# Altium PCB P-MT3620EXMSTLP-2-0.PcbDoc (part 3 of 3)
Units mm, origin at the board's own origin, x right, y up, seen from the top; angles counter-clockwise.
Board outline 50.01 x 80.01 mm, 4 copper layers (Top Layer, Mid-Layer 1, Mid-Layer 2, Bottom Layer), stack 1.536 mm thick; 94 components, 87 nets, 380 pads, 193 vias.
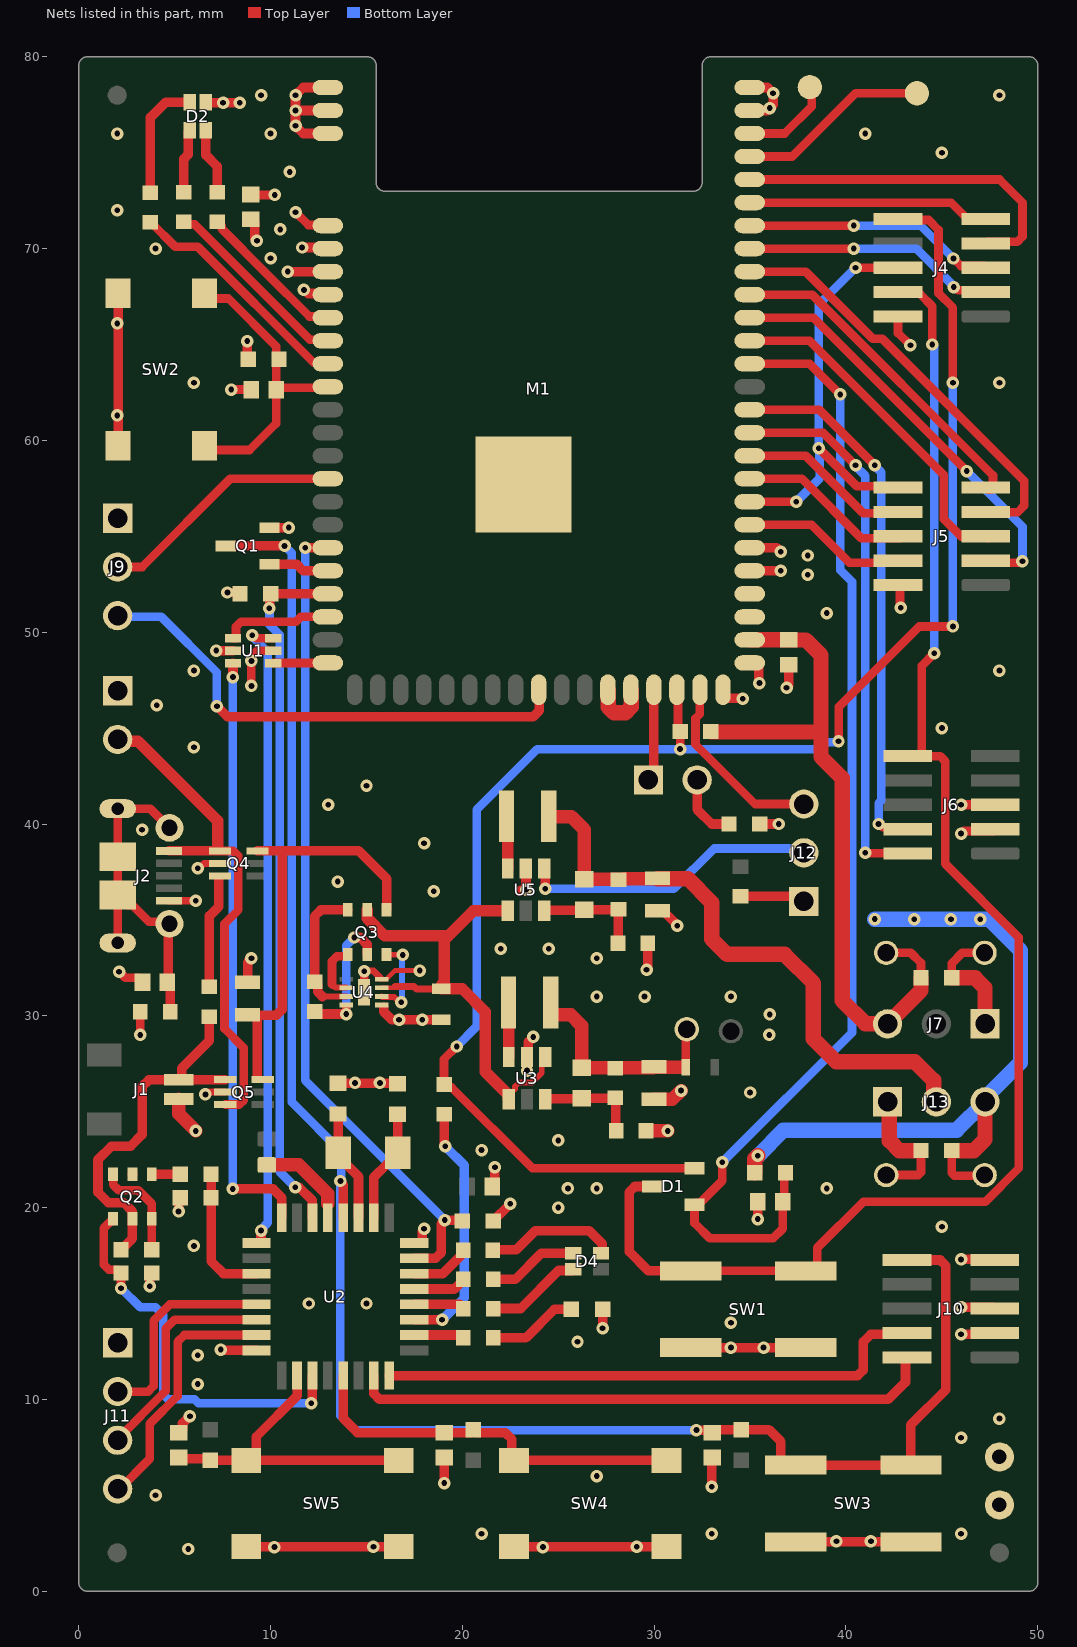
[diagram p4: the nets of this part, all layers, seen from the top]

## Via types
v1: diameter 0.65, hole 0.3, Top Layer to Bottom Layer, tented both sides, 193 vias

## Nets (pads, with @x,y where several pads share a name; then routed paths per layer and width w, separated by ;. In a path a pad name is that pad's centre, name@x,y a point inside that pad or via, vN(x,y) a via of type N, cw(c..) or ccw(c..) an arc to the next point about the centre after c; other vN are vias at no path point) (continued)
3V3_MT3620: C3.2 D2.4 J13.3 M1.2 M1.3 M1.42 M1.43 R2.2 R4.2 R27.2 TP6.1 U1.5 | length 51.2
  Top Layer w0.45: v1(9,47.2) 9,48.746 9.293,49.039 10.136,49.039 U1.5@10.138,49.037 ; R27.2@45.51,22.975 45.51,21.808 45.656,21.661 TP6.1@47.191,21.661
  Top Layer w0.5: D2.4@6.625,77.625 6.65,77.6 v1(8.396,77.6) ; v1(8.788,65.176) 8.788,64.285 R4.2@8.837,64.236 ; C3.2@8.964,71.524 9.015,71.524 9.171,71.368 9.171,70.529 v1(9.284,70.416) ; v1(10.9,68.8) M1.3@12.984,68.8 ; v1(11.638,70.057) 12.927,70.057 M1.2@12.984,70 ; M1.42@34.984,53.2 v1(36.6,53.2) ; M1.43@35.041,54.343 M1.43@34.984,54.4 36.4,54.4 v1(36.6,54.2)
  Top Layer w0.6: R27.2@45.646,22.975 R27.2@45.66,22.961
  Top Layer w0.8: R2.2@35.249,21.809 35.249,22.552 v1(35.399,22.702) ; R27.2@45.66,22.961 46.66,22.961 47.25,23.551 J13.3@47.25,25.515
  Bottom Layer w0.8: v1(35.399,22.702) 36.736,24.04 45.774,24.04 J13.3@47.25,25.515 47.25,25.711 49.098,27.56 49.098,33.402 47.464,35.036 v1(47.001,35.036) 45.476,35.036 v1(45.472,35.04) v1@43.64,35.04 ; v1(41.499,35.043) v1@43.558,35.043
  other v1: 43.565,35.036 9,48.5 7.523,77.6
3V3_MT3620_RTC: C4.2 J7.3 M1.39 R3.2 R5.2 TP2.1 | length 37.1
  Top Layer w0.45: TP2.1@42.092,33.283 43.377,33.283 43.91,32.75 R3.2@43.91,31.975
  Top Layer w0.8: R5.2@32.95,44.826 32.976,44.8 38.7,44.8 ; M1.39@34.984,49.6 35.384,49.6 35.387,49.603 C4.2@37.015,49.603 37.022,49.597 37.903,49.597 38.7,48.8 38.7,44.8 ; R3.2@43.91,31.975 43.91,31.319 J7.3@42.17,29.579 42.157,29.592 41.008,29.592 39.8,30.8 39.8,42.4 38.7,43.5 38.7,44.8
BATTERY_LEVEL: R20.1 R22.2 U2.11 | length 7
  Top Layer w0.5: R20.1@6.896,21.59 6.896,20.32 6.896,17.204 7.545,16.555 U2.11@9.266,16.555
DEBUG_CTS: J5.8 M1.47 | length 9.1
  Top Layer w0.45: M1.47@34.984,59.2 37.9,59.2 40.9,56.2 42.784,56.2 J5.8@42.814,56.17
DEBUG_RTS: J4.6 J5.10 M1.45 | length 23
  Top Layer w0.45: M1.45@34.984,56.8 v1(37.4,56.8) ; v1(38.583,59.588) 40.561,57.61 J5.10@42.651,57.61 ; v1(40.5,69) J4.6@42.714,69
  Bottom Layer w0.45: v1(37.4,56.8) 38.625,58.025 38.625,58.592 38.621,58.596 38.621,59.55 v1(38.583,59.588) 38.583,67.083 v1(40.5,69)
DEBUG_RXD: J5.4 M1.44 | length 8.6
  Top Layer w0.45: M1.44@34.984,55.6 38.2,55.6 40.17,53.63 J5.4@42.814,53.63
DEBUG_TXD: J5.6 M1.46 | length 9.1
  Top Layer w0.45: M1.46@34.984,58 37.7,58 40.8,54.9 J5.6@42.814,54.9
EXT_PMU_EN: J12.3 M1.36 | length 9.9
  Top Layer w0.45: M1.36@32.384,47 32.384,45.737 32.15,45.503 32.15,44.15 35.26,41.04 J12.3@37.8,41.04
FLASH_STM32: M1.15 R14.2 U2.31 | length 43.5
  Top Layer w0.5: v1(11.8,54.4) M1.15@12.984,54.4 ; U2.31@17.496,17.355 17.5,17.359 18.607,17.359 18.9,17.652 18.9,19.167 v1(19.082,19.349) ; v1@19.072,19.35 19.85,19.35 R14.2@19.95,19.25
  Bottom Layer w0.45: v1(11.8,54.4) 11.8,26.631 v1(19.082,19.349)
GND: C1.2 C2.1 C3.1 C4.1 C5.1 C6.1 C7.1 C8.1 C9.1 C10.1 C11.1 C12.1 C14.1 C16.1 C17.1 D3.1 J1.2 J2.5 J3.1 J4.2 J5.2 J6.3 J6.5 J9.1 J10.3 J10.5 J10.9 J11.1 M1.1 M1.4 M1.37 M1.38 M1.40 M1.41 M1.62 M1.63 M1.64 M1.65 M1.66 M1.67 pad.4 Q1.2 Q2.5 Q4.2 Q5.2 R1.1 R6.1 R7.1 R14.1 R22.1 R23.1 R25.1 R31.1 SW1.2 SW1.4 SW2.3 SW2.4 SW3.1 SW3.3 SW4.1 SW4.2 SW5.1 SW5.2 U1.2 U2.16 U2.32 U3.2 U4.1 U4.4 U4.9 U5.2 | length 113.5
  Top Layer w0.25: U4.4@15.794,31.908 16.019,31.908 16.471,32.36 17.755,32.36 v1@17.779,32.384
  Top Layer w0.35: v1(6.198,37.694) 6.279,37.694 6.527,37.942 7.359,37.942 Q4.2@7.361,37.945 ; v1(6.6,25.9) 6.722,26.022 Q5.2@7.629,26.022 ; v1(14.889,32.328) 14.904,32.343 15.362,32.343 U4.4@15.731,31.974
  Top Layer w0.4: J2.5@4.703,35.999 6.099,35.999 v1(6.1,36)
  Top Layer w0.45: v1(2.1,32.3) 2.418,31.982 3.141,31.982 3.323,31.801 C1.2@3.323,31.75 ; v1(3.2,29) 3.213,29.013 R1.1@3.213,30.209 ; v1(7.75,52.07) 8.33,52.07 R6.1@8.4,52 ; v1(7.949,62.651) C5.1@8.989,62.651 ; C3.1@8.964,72.819 8.987,72.796 v1(10.211,72.796) ; v1(11.3,71.9) 11.972,71.228 12.956,71.228 M1.1@12.984,71.2 ; U4.9@14.889,31.253 v1(14.889,32.328) ; J4.2@42.714,66.46 42.714,65.599 v1(43.357,64.957) ; J5.2@42.814,52.368 42.814,51.306 v1(42.85,51.27) ; v1(46,39.5) 46.137,39.638 47.693,39.638 J6.3@47.786,39.73
  Top Layer w0.5: SW2.4@2.05,59.725 SW2.3@2.05,67.675 ; Q2.5@2.794,21.737 Q2.5@2.798,21.741 ; v1(3.7,15.9) 3.7,16.492 R23.1@3.8,16.592 ; C11.1@5.201,8.266 5.251,8.266 5.408,8.422 5.408,8.751 5.776,9.119 v1(5.791,9.119) ; v1(5.2,19.8) 5.2,20.41 R22.1@5.296,20.506 ; v1(7.167,49.039) 8.036,49.039 U1.2@8.038,49.037 ; v1(7.4,12.6) 7.445,12.555 U2.16@9.266,12.555 ; SW5.2@8.725,2.322 SW5.1@16.675,2.322 ; C16.1@8.8,31.75 8.8,32.8 v1(9,33) ; Q1.2@9.943,55.453 v1(10.941,55.453) v1@10.945,55.456 ; v1(11.735,67.843) 11.775,67.843 11.961,67.657 12.927,67.657 M1.4@12.984,67.6 ; M1.64@12.984,76 11.7,76 v1(11.3,76.4) v1(11.3,77.2) ; M1.65@12.984,77.2 v1(11.3,77.2) ; M1.66@12.984,78.4 11.7,78.4 v1(11.3,78) v1(11.3,77.2) ; C9.1@13.512,26.484 13.524,26.472 16.607,26.472 C8.1@16.619,26.461 ; U4.1@15.894,30.433 15.894,30.218 16.312,29.8 C14.1@18.9,29.8 ; U2.32@17.496,18.155 17.897,18.155 17.901,18.159 17.901,18.801 v1(18,18.9) ; v1@19.05,5.639 C10.1@19.05,6.972 ; C6.1@21.548,21.1 21.697,21.249 v1(21.697,22.102) ; R14.1@21.6,19.3 v1(22.5,20.2) ; SW4.2@22.695,2.322 SW4.1@30.645,2.322 ; 23,36.5 23.047,36.547 23.289,36.547 v1(23.317,36.576) 23.316,36.578 23.316,37.674 U5.2@23.314,37.676 ; v1(23.368,27.143) U3.2@23.368,27.854 23.443,27.929 23.443,28.643 v1(23.7,28.9) ; v1(27.309,13.709) 27.309,14.684 D3.1@27.325,14.7 ; v1(29.6,32.4) 29.664,32.464 R31.1@29.664,33.782 ; C17.1@30.172,35.472 30.472,35.472 31.2,34.744 v1(31.2,34.7) ; SW1.2@31.9,12.7 SW1.4@37.9,12.7 ; v1(33.003,5.446) 33.003,6.955 C7.1@33.02,6.972 ; M1.37@33.584,47 33.584,46.7 33.723,46.561 34.592,46.561 v1(34.62,46.533) ; M1.38@34.984,48.4 35.303,48.4 35.441,48.261 35.441,47.429 35.484,47.386 v1(35.484,47.346) ; M1.62@34.984,77.2 35.9,77.2 36.2,77.5 v1(36.2,78.1) 35.9,78.4 M1.63@34.984,78.4 ; v1(35.4,19.4) 35.4,20.308 C2.1@35.401,20.309 ; R7.1@35.5,40 v1(36.5,40) ; v1(36.9,47.1) 37.015,47.215 C4.1@37.015,48.308 ; SW3.3@37.386,2.572 SW3.1@43.386,2.572 ; v1(46,13.4) 47.69,13.4 J10.3@47.752,13.462 ; v1@46,14.8 47.684,14.8 J10.5@47.752,14.732 ; v1(46,17.3) 47.724,17.3 J10.9@47.752,17.272 ; v1(46,41) J6.5@47.786,41
  Top Layer w0.7: J1.2@5.207,25.662 5.207,24.893 v1(6.1,24) ; R25.1@29.575,24 v1(30.7,24) ; C12.1@29.979,25.643 30.943,25.643 v1(31.4,26.1)
  other v1: 5.7,2.2 10.2,2.3 24.2,2.3 15.362,2.322 29.088,2.322 39.5,2.6 41.3,2.6 21,3 33,3 46,3 4,5 19.051,5.638 27,6 46,8 48,9 6.2,10.8 6.2,12.3 34,12.7 35.7,12.7 26,13 34,14 46,14.8 12,15 15,15 6,18 45,19 25,20 25.5,21 27,21 39,21 21,23 25,23.5 35,26 14.4,26.5 15.7,26.5 36,29 16.7,29.8 17.9,29.8 36.02,30.073 27,31 29.5,31 34,31 17.78,32.36 27,33 22,33.5 24.5,33.5 18.5,36.5 13.5,37 18,39 3.3,39.7 13,41 15,42 6,44 45,45 4.057,46.187 6,48 48,48 39,51 38,53 38,54 2,61.3 6,63 48,63 2,66.1 10,69.5 4,70 10.5,71 2,72 11,74 45,75 2,76 10,76 41,76 36.027,77.327 9.5,78 48,78
MEASURE_BATTERY: Q2.1 R23.2 U2.19 | length 20.8
  Top Layer w0.45: Q2.1@1.78,19.407 1.78,19.311 1.755,19.286 1.659,19.286 1.3,18.927 1.3,17.031 1.564,16.767 2.025,16.767 R23.2@2.2,16.592 2.2,16.442 v1(2.2,15.8)
  Top Layer w0.5: v1(12.116,9.804) 12.116,9.845 12.181,9.91 U2.19@12.181,11.24
  Bottom Layer w0.45: v1(2.2,15.8) 3.2,14.8 4,14.8 4.4,14.4 4.4,10.264 4.664,10 6.041,10 6.237,9.804 v1(12.116,9.804)
MT3620_BUTTON_A: C5.2 M1.8 R4.1 SW2.1 SW2.2 | length 16
  Top Layer w0.45: SW2.2@6.568,59.525 6.593,59.5 8.9,59.5 10.285,60.885 C5.2@10.285,62.651 ; SW2.1@6.568,67.475 6.643,67.4 7.8,67.4 10.3,64.9 10.3,64.373 R4.1@10.437,64.236 10.285,64.084 C5.2@10.285,62.651 ; M1.8@12.984,62.8 12.927,62.743 10.376,62.743 C5.2@10.285,62.651
MT3620_LED_B: M1.7 R9.2 | length 12.3
  Top Layer w0.45: R9.2@3.735,71.367 3.76,71.367 5.027,70.1 6.2,70.1 12.243,64.057 12.927,64.057 M1.7@12.984,64
MT3620_LED_G: M1.5 R8.1 | length 7.9
  Top Layer w0.45: R8.1@7.22,71.397 7.245,71.397 7.451,71.191 7.451,71.03 9.7,68.781 12.023,66.457 12.927,66.457 M1.5@12.984,66.4
MT3620_LED_R: M1.6 R10.1 | length 10.1
  Top Layer w0.45: R10.1@5.476,71.397 5.607,71.266 6.034,71.266 6.438,70.862 ; 6.438,70.861 12.041,65.257 12.927,65.257 M1.6@12.984,65.2
MT3620_RESET: D1.3 J4.4 J6.10 SW1.1 SW1.3 | length 77.9
  Top Layer w0.45: SW1.1@31.9,16.7 SW1.3@37.9,16.7 38.225,16.7 38.5,16.975 38.5,17.9 40.909,20.309 47.267,20.309 49,22.042 49,34.1 45.174,37.926 45.174,43.276 44.91,43.54 43.945,43.54 43.945,48.243 v1(44.598,48.897) ; J4.4@42.714,67.73 42.806,67.637 43.863,67.637 44.5,67 v1(44.5,65)
  Top Layer w0.5: D1.3@29.9,21.1 28.993,21.1 28.7,20.807 28.7,17.7 29.7,16.7 SW1.1@31.9,16.7
  Bottom Layer w0.45: v1(44.5,65) 44.598,64.902 v1(44.598,48.897)
MT3620_RX: M1.20 U1.4 | length 2.8
  Top Layer w0.45: U1.4@10.144,48.394 M1.20@12.978,48.394
MT3620_SPARE1: J9.2 M1.12 | length 12.7
  Top Layer w0.45: J9.2@2.2,53.4 3.3,53.4 7.9,58 M1.12@12.984,58
MT3620_SPARE2: J9.3 M1.29 | length 26.4
  Top Layer w0.5: v1(7.2,46.14) 7.74,45.6 23.7,45.6 24,45.9 24,46.984 M1.29@23.984,47
  Bottom Layer w0.45: J9.3@2.025,50.86 2.086,50.8 4.3,50.8 7.2,47.9 v1(7.2,46.14)
MT3620_SWCLK: J6.4 M1.49 | length 28.2
  Top Layer w0.45: M1.49@34.984,61.6 38.6,61.6 v1(41.5,58.7) ; v1(41.7,40) 41.754,40 41.932,39.822 43.121,39.822 J6.4@43.214,39.73
  Bottom Layer w0.45: v1(41.5,58.7) 41.5,58.67 41.834,58.336 41.834,41.225 41.7,41.091 v1(41.7,40)
MT3620_SWDIO: J6.2 M1.48 | length 28.4
  Top Layer w0.45: M1.48@34.984,60.4 38.8,60.4 v1(40.5,58.7) ; v1(41.01,38.5) 41.03,38.48 42.73,38.48 J6.2@42.75,38.5
  Bottom Layer w0.45: v1(40.5,58.7) 40.5,58.654 41,58.154 41,38.51 v1(41.01,38.5)
MT3620_SYSRST_N: C2.2 D1.1 M1.51 R2.1 | length 60.5
  Top Layer w0.45: v1(33.554,22.366) 33.554,21.399 32.405,20.25 32.2,20.25 D1.1@32.1,20.15 32.1,19.2 32.9,18.4 36.2,18.4 36.697,18.897 C2.2@36.697,20.309 36.773,20.385 36.773,21.733 R2.1@36.849,21.809 ; M1.51@34.984,64 38.1,64 v1(39.7,62.4)
  Bottom Layer w0.45: v1(33.554,22.366) 40.31,29.122 40.31,52.634 39.7,53.243 v1(39.7,62.4)
MT3620_TX: M1.18 U1.1 | length 5.8
  Top Layer w0.45: U1.1@8.038,49.687 8.198,49.687 8.198,50.282 8.462,50.546 11.328,50.546 11.582,50.8 M1.18@12.984,50.8
NetC1_1: C1.1 J2.6 J2.7 J2.8 J2.9 J2.10 R1.2 | length 18.1
  Top Layer w0.45: J2.9@2.028,33.798 J2.6@2.028,36.298 ; J2.7@4.728,34.799 4.673,34.743 4.507,34.91 3.655,34.91 2.791,35.774 2.553,35.774 J2.6@2.028,36.298 ; J2.8@4.728,39.799 3.728,40.799 J2.10@2.028,40.799 J2.6@2.028,38.299 J2.6@2.028,36.298
  Top Layer w0.5: J2.7@4.673,34.743 4.673,31.805 C1.1@4.618,31.75 4.762,31.606 R1.2@4.762,30.234
NetC8_2: C8.2 U2.2 X1.1 | length 6
  Top Layer w0.5: U2.2@15.381,19.47 15.385,19.474 15.385,21.585 16.054,22.254 16.221,22.254 16.631,22.665 X1.1@16.631,22.855 16.625,22.861 16.625,24.855 C8.2@16.619,24.861
NetC9_2: C9.2 U2.3 X1.2 | length 5.9
  Top Layer w0.5: C9.2@13.512,24.884 13.522,24.874 13.522,22.865 X1.2@13.532,22.855 13.532,22.665 14.581,21.616 U2.3@14.581,19.47
NetC12_2: C12.2 C13.2 L1.2 R21.1 R24.2 TP3.1 | length 11.9
  Top Layer w0.45: R21.1@31.651,27.319 TP3.1@31.651,29.251
  Top Layer w0.7: L1.2@24.6,30.7 24.6,30.11 24.65,30.06 25.64,30.06 26.229,29.471 C13.2@26.229,27.293 26.242,27.28 27.966,27.28 R24.2@27.979,27.268 28.004,27.293 29.954,27.293 29.979,27.319 R21.1@31.526,27.319
NetC13_1: C13.1 R24.1 R25.2 U3.6 | length 5.4
  Top Layer w0.5: U3.6@24.318,25.654 24.337,25.673 26.21,25.673 C13.1@26.229,25.693 26.242,25.706 27.966,25.706 R24.1@27.979,25.718 28.002,25.695 28.002,24.023 R25.2@28.025,24
NetC14_2: C14.2 Q3.5 U3.1 U3.4 U4.3 U5.4 | length 26
  Top Layer w0.25: U4.3@15.794,31.458 16.42,31.458 16.49,31.528
  Top Layer w0.3: U3.4@22.418,25.654 22.418,25.859 22.743,26.184 22.743,26.308 22.952,26.518 23.627,26.518 24.143,27.034 24.143,27.679 U3.1@24.318,27.854
  Top Layer w0.36: 16.49,31.528 17.484,31.528 17.611,31.4 C14.2@18.9,31.4
  Top Layer w0.6: Q3.5@15.038,35.522 15.038,35.079 15.954,34.163 19.05,34.163 19.263,34.163 ; U5.4@22.364,35.476 20.576,35.476 19.263,34.163 ; U3.4@22.418,25.654 22.393,25.679 22.393,25.884 21.197,27.08 21.197,30.204 20,31.4 C14.2@18.9,31.4 18.925,31.425 18.925,31.626 19.05,31.751 19.05,33.95 19.263,34.163
NetC15_1: C15.1 R29.1 R31.2 U5.6 | length 5.7
  Top Layer w0.5: U5.6@24.264,35.476 24.287,35.499 26.339,35.499 C15.1@26.362,35.522 26.375,35.535 R29.1@28.127,35.535 ; R31.2@28.115,33.782 28.127,33.795 R29.1@28.127,35.535 ; R29.1@28.14,35.547 R29.1@28.127,35.535
NetC15_2: C15.2 C17.2 J13.2 L2.2 R29.2 | length 31.3
  Top Layer w0.7: L2.2@24.5,40.386 25.686,40.386 26.362,39.71 C15.2@26.362,37.122 26.375,37.109 28.127,37.109 R29.2@28.14,37.097 28.171,37.128 28.378,37.128 28.398,37.148 C17.2@30.172,37.148
  Top Layer w0.8: C17.2@30.172,37.148 31.753,37.148 33,35.9 33,34 33.8,33.2 36.8,33.2 38.3,31.7 38.3,28.8 39.5,27.6 43.6,27.6 44.569,26.631 44.569,26.169 44.571,26.166 44.571,25.654 J13.2@44.71,25.515
NetC16_2: C16.2 Q3.4 Q4.6 Q5.6 | length 22.5
  Top Layer w0.5: C16.2@8.8,30.05 8.816,30.034 C16.2@9.3,30.034 ; Q5.6@9.3,26.744 C16.2@9.3,30.034 ; Q4.6@9.317,38.595 10.5,38.595 ; Q3.4@16.048,35.522 16.048,37.152 14.605,38.595 10.5,38.595 ; C16.2@9.3,30.034 10.307,30.034 10.6,30.327 10.6,38.495 10.5,38.595
NetD2_1: D2.1 R8.2 | length 3.5
  Top Layer w0.5: D2.1@6.625,76.175 6.625,74.875 7.22,74.28 R8.2@7.22,72.946
NetD2_2: D2.2 R10.2 | length 3.4
  Top Layer w0.5: R10.2@5.476,72.946 5.476,74.676 5.7,74.9 5.7,76.1 D2.2@5.775,76.175
NetD2_3: D2.3 R9.1 | length 6.3
  Top Layer w0.5: R9.1@3.735,72.916 3.735,76.835 4.525,77.625 D2.3@5.775,77.625
NetD3_2: D3.2 R11.1 | length 4.7
  Top Layer w0.5: R11.1@21.603,13.208 23.308,13.208 24.8,14.7 D3.2@25.675,14.7
NetD4_1: D4.1 R16.2 | length 5
  Top Layer w0.5: R16.2@21.603,14.732 21.612,14.741 23.041,14.741 25.02,16.72 25.72,16.72 D4.1@25.775,16.775
NetD4_2: D4.2 R17.2 | length 4.7
  Top Layer w0.5: R17.2@21.603,16.256 22.756,16.256 24.125,17.625 D4.2@25.775,17.625
NetD4_3: D4.3 R18.1 | length 6.9
  Top Layer w0.5: R18.1@21.59,17.78 21.61,17.8 22.8,17.8 23.8,18.8 26.6,18.8 27.3,18.1 27.3,17.7 D4.3@27.225,17.625
NetFB1_2: FB1.2 U2.5 | length 4.3
  Top Layer w0.7: FB1.2@9.8,22.225 11.475,22.225 12.981,20.719 U2.5@12.981,20.2
NetIO1_1: IO1.1 M1.61 | length 5.1
  Top Layer w0.45: M1.61@34.984,76 36.8,76 38.208,77.408 IO1.1@38.208,78.66
NetIO2_1: IO2.1 M1.60 | length 10.1
  Top Layer w0.45: M1.60@34.984,74.8 37.2,74.8 40.5,78.1 IO2.1@43.7,78.1
NetJ7_1: J7.1 R3.1 TP1.1 | length 6.5
  Top Layer w0.45: R3.1@45.51,31.975 45.51,32.727 46.065,33.283 TP1.1@47.224,33.283
  Top Layer w0.8: R3.1@45.51,31.975 46.73,31.975 47.25,31.455 J7.1@47.25,29.579
NetJ8_1: J8.1 M1.34 | length 4.8
  Top Layer w0.5: J8.1@29.7,42.3 29.984,42.584 M1.34@29.984,47
NetJ8_2: J8.2 R7.2 | length 3.5
  Top Layer w0.5: J8.2@32.24,42.3 32.24,40.76 33,40 R7.2@33.925,40
NetJ12_1: J12.1 R28.1 | length 3.4
  Top Layer w0.5: R28.1@34.5,36.225 37.535,36.225 J12.1@37.8,35.96
NetJ12_2: J12.2 U5.1 | length 15.5
  Top Layer w0.5: U5.1@24.264,37.676 24.323,37.617 v1(24.323,36.618)
  Bottom Layer w0.45: v1(24.323,36.618) 31.018,36.618 33.125,38.725 36.999,38.725 37.019,38.705 37.595,38.705 J12.2@37.8,38.5
NetJ13_1: J13.1 R27.1 TP5.1 | length 6.9
  Top Layer w0.45: TP5.1@42.095,21.696 43.763,21.696 43.91,21.842 R27.1@43.91,22.975
  Top Layer w0.6: J13.1@42.17,25.515 J13.1@42.256,25.429 ; R27.1@43.81,22.961 R27.1@43.824,22.975
  Top Layer w0.8: J13.1@42.256,25.429 42.256,23.487 42.782,22.961 R27.1@43.81,22.961
NetL1_1: L1.1 U3.3 | length 2.9
  Top Layer w0.6: L1.1@22.4,30.7 22.416,30.684 22.416,28.086 22.418,28.084 U3.3@22.418,27.854
NetL2_1: L2.1 U5.3 | length 2.8
  Top Layer w0.6: L2.1@22.214,40.386 22.364,40.236 U5.3@22.364,37.676
NetM1_32: M1.32 M1.33 | length 3.3
  Top Layer w0.8: M1.32@27.584,47 27.6,46.984 27.6,46.1 27.9,45.8 28.5,45.8 28.8,46.1 28.8,46.984 M1.33@28.784,47
NetQ2_3: Q2.3 Q2.6 R19.1 | length 5.4
  Top Layer w0.45: Q2.6@1.784,21.737 1.788,21.733 1.788,21.193 2.081,20.9 3.103,20.9 3.8,20.203 3.8,19.536 3.804,19.532 Q2.3@3.804,19.411 3.802,19.409 3.802,17.802 R19.1@3.8,17.8
NetQ2_4: Q2.4 R20.2 | length 1.5
  Top Layer w0.5: Q2.4@3.804,21.737 3.804,21.735 3.808,21.731 R20.2@5.296,21.731
NetQ3_1: Q3.1 U4.6 | length 3
  Top Layer w0.3: 13.222,31.63 13.378,31.473 U4.6@13.944,31.473
  Top Layer w0.45: 13.222,31.63 13.2,31.651 13.2,32.839 13.464,33.102 13.999,33.102 14.028,33.131 Q3.1@14.028,33.196
NetQ3_2: Q3.2 R26.1 U4.8 | length 7.5
  Top Layer w0.45: v1(13.944,30.092) 13.944,30.425
  Top Layer w0.5: R26.1@12.3,30.225 12.431,30.094 12.96,30.094 12.963,30.092 v1(13.944,30.092) ; v1(14.367,34.083) 14.679,34.083 15.034,33.728 15.034,33.2 Q3.2@15.038,33.196
  Bottom Layer w0.45: v1(13.944,30.092) 13.944,33.66 v1(14.367,34.083)
NetQ3_3: Q3.3 U4.2 | length 4.5
  Top Layer w0.3: U4.2@15.794,31.008 15.819,30.983 16.446,30.983 16.72,30.709 v1(16.815,30.709) ; Q3.3@16.048,33.196 16.06,33.184 16.879,33.184 v1(16.891,33.172)
  Bottom Layer w0.3: v1(16.815,30.709) 16.853,30.747 16.853,33.134 v1(16.891,33.172)
NetQ3_6: Q3.6 R26.2 U4.7 | length 7.5
  Top Layer w0.3: 12.698,31.008 U4.7@13.944,31.008
  Top Layer w0.5: 12.698,31.008 12.456,31.25 12.456,31.644 12.325,31.775 R26.2@12.3,31.775 12.3,35.2 12.622,35.522 Q3.6@14.028,35.522
NetQ4_3: Q4.3 R30.2 | length 5.9
  Top Layer w0.5: R30.2@6.804,31.509 6.804,35.204 7.3,35.7 Q4.3@7.3,37.192
NetR32_1: R32.1 U2.27 | length 13.1
  Top Layer w0.5: U2.27@17.496,14.155 v1(18.94,14.155) ; R32.1@19.044,24.869 19.044,23.256 v1(19.1,23.2)
  Bottom Layer w0.5: v1(18.94,14.155) 18.955,14.155 20.1,15.3 20.1,22.2 v1(19.1,23.2)
RECOVERY_CTS: J4.7 M1.59 | length 18.5
  Top Layer w0.45: M1.59@34.984,73.6 48,73.6 49.2,72.4 49.2,70.626 48.936,70.362 47.378,70.362 J4.7@47.286,70.27
RECOVERY_RTS: J4.9 M1.58 | length 12.7
  Top Layer w0.45: M1.58@34.984,72.4 45.473,72.4 46.333,71.54 J4.9@47.286,71.54
RECOVERY_RXD: J4.3 M1.56 | length 13.3
  Top Layer w0.45: M1.56@34.984,70 v1(40.4,70) ; v1(45.618,67.996) 45.673,67.996 45.846,67.822 47.193,67.822 J4.3@47.286,67.73
  Bottom Layer w0.45: v1(40.4,70) 43.657,70 45.618,68.038 v1(45.618,67.996)
RECOVERY_TXD: J4.5 M1.57 | length 13.2
  Top Layer w0.45: M1.57@34.984,71.2 v1(40.4,71.2) ; v1(45.6,69.484) 45.992,69.092 47.193,69.092 J4.5@47.286,69
  Bottom Layer w0.45: v1(40.4,71.2) 43.884,71.2 v1(45.6,69.484)
RESET_STM32: M1.16 Q1.1 | length 3.2
  Top Layer w0.5: Q1.1@9.943,53.548 11.352,53.548 11.7,53.2 M1.16@12.984,53.2
SERVICE_CTS: J5.7 M1.55 | length 22.2
  Top Layer w0.45: M1.55@34.984,68.8 37.9,68.8 41.4,65.3 41.887,65.3 49.3,57.887 49.3,56.6 48.962,56.262 47.478,56.262 J5.7@47.386,56.17
SERVICE_RTS: J5.9 M1.54 | length 17.5
  Top Layer w0.45: M1.54@34.984,67.6 38.235,67.6 47.667,58.169 47.667,57.532 47.574,57.44 J5.9@47.386,57.44
SERVICE_RXD: J5.3 M1.53 | length 22.4
  Top Layer w0.45: M1.53@34.984,66.4 38.3,66.4 v1(46.3,58.4) ; J5.3@47.386,53.63 49.13,53.63 v1(49.2,53.7)
  Bottom Layer w0.45: v1(46.3,58.4) 49.2,55.5 v1(49.2,53.7)
SERVICE_TXD: J5.5 M1.52 | length 18
  Top Layer w0.45: M1.52@34.984,65.2 38.1,65.2 45.1,58.2 45.1,55.9 46.008,54.992 47.293,54.992 J5.5@47.386,54.9
ST_SWCLK: J10.4 U2.24 | length 28.8
  Top Layer w0.5: U2.24@16.181,11.24 40.607,11.24 40.9,11.533 40.9,13 41.294,13.394 43.112,13.394 J10.4@43.18,13.462
ST_SWDIO: J10.2 U2.23 | length 30.5
  Top Layer w0.5: U2.23@15.381,11.24 15.385,11.236 15.385,10.293 15.678,10 42.2,10 43.1,10.9 43.1,12.124 43.168,12.192 J10.2@43.18,12.192
STM32_BUTTON_A: C11.2 R15.1 SW5.3 SW5.4 U2.18 | length 17.1
  Top Layer w0.5: C11.2@5.201,6.971 5.276,6.895 6.783,6.895 R15.1@6.858,6.82 6.859,6.821 8.851,6.821 SW5.4@8.852,6.822 ; SW5.4@8.725,6.822 SW5.4@8.852,6.822 ; 9.25,7.512 9.25,7.22 SW5.4@8.852,6.822 ; 9.25,7.513 9.25,8.05 11.381,10.181 U2.18@11.381,11.24 ; SW5.3@16.675,6.822 SW5.4@8.852,6.822
STM32_BUTTON_B: C10.2 R13.1 SW4.3 SW4.4 U2.21 | length 20.6
  Top Layer w0.5: U2.21@13.781,11.24 13.781,9.019 14.532,8.268 C10.2@19.05,8.268 20.422,8.268 R13.1@20.574,8.42 20.724,8.27 22.23,8.27 22.573,7.927 22.573,6.944 SW4.4@22.695,6.822 ; SW4.4@22.8,6.822 SW4.3@30.645,6.822
STM32_LED_B: R18.2 U2.30 | length 3.1
  Top Layer w0.5: U2.30@17.496,16.555 18.982,16.555 19.91,17.482 19.91,17.649 R18.2@20.041,17.78
STM32_LED_ERROR: R11.2 U2.26 | length 2.6
  Top Layer w0.5: U2.26@17.496,13.355 19.922,13.355 20.022,13.255 R11.2@20.022,13.177
STM32_LED_G: R17.1 U2.29 | length 2.8
  Top Layer w0.5: U2.29@17.496,15.755 19.578,15.755 20.053,16.231 R17.1@20.053,16.256
STM32_LED_R: R16.1 U2.28 | length 2.7
  Top Layer w0.5: U2.28@17.496,14.955 19.856,14.955 20.053,14.757 R16.1@20.053,14.732
STM32_RESET: C7.2 J10.10 Q1.3 R12.1 SW3.2 SW3.4 U2.4 | length 96.5
  Top Layer w0.5: Q1.3@7.657,54.5 v1(10.73,54.5) ; v1(13.64,21.387) 13.64,21.346 13.785,21.201 13.785,19.474 U2.4@13.781,19.47 ; v1(32.2,8.4) 32.888,8.4 C7.2@33.02,8.268 33.172,8.42 35.98,8.42 36.6,7.8 36.6,6.822 36.85,6.572 SW3.4@37.386,6.572 SW3.2@43.386,6.572 43.386,8.686 45.2,10.5 45.2,16.974 44.907,17.266 43.186,17.266 J10.10@43.18,17.272
  Bottom Layer w0.45: v1(10.73,54.5) 11.1,54.13 11.1,25.5 13.792,22.808 13.792,22.358 13.678,22.244 13.678,21.425 v1(13.64,21.387) 13.64,9.16 13.78,9.02 14.4,8.4 v1(32.2,8.4)
STM32_RX: U1.6 U2.9 | length 33.5
  Top Layer w0.45: v1(9.042,49.835) 9.097,49.835 9.248,49.684 U1.6@10.135,49.684
  Top Layer w0.5: U2.9@9.266,18.155 9.496,18.155 9.5,18.159 v1(9.5,18.8)
  Bottom Layer w0.45: v1(9.042,49.835) 9.042,49.781 9.855,48.968 9.855,19.209 9.5,18.854 v1(9.5,18.8)
STM32_SPARE_1: J11.2 U2.13 | length 11.1
  Top Layer w0.45: J11.2@2.025,10.409 2.035,10.4 3.607,10.4 3.9,10.693 3.9,14.1 4.755,14.955 U2.13@9.266,14.955
STM32_SPARE_2: J11.3 U2.14 | length 11.8
  Top Layer w0.45: J11.3@2.025,7.869 2.025,7.934 4.525,10.434 4.525,13.687 4.993,14.155 U2.14@9.266,14.155
STM32_SPARE_3: J11.4 U2.15 | length 13.3
  Top Layer w0.45: J11.4@2.025,5.329 2.129,5.329 3.7,6.9 3.7,8.725 5.15,10.175 5.15,13 5.505,13.355 U2.15@9.266,13.355
STM32_TX: U1.3 U2.8 | length 31.2
  Top Layer w0.5: v1(8.025,20.975) 10.125,20.975 10.577,20.523 10.577,19.474 U2.8@10.581,19.47 ; v1(8.038,47.662) U1.3@8.038,48.387
  Bottom Layer w0.45: v1(8.025,20.975) 8.025,47.649 v1(8.038,47.662)
V_BAT: J1.1 Q2.2 Q5.1 R19.2 R30.1 | length 20
  Top Layer w0.5: R19.2@2.2,17.8 2.79,18.39 2.79,19.407 Q2.2@2.794,19.411 2.79,19.415 2.79,19.807 2.344,20.254 1.546,20.254 1,20.8 1,22.5 1.7,23.2 2.7,23.2 3.3,23.8 3.3,26.307 3.655,26.662 J1.1@5.207,26.662 ; R30.1@6.804,29.959 6.804,28.704 5.363,27.263 5.363,26.712 5.313,26.662 J1.1@5.207,26.662 ; Q5.1@7.629,26.672 7.624,26.667 5.687,26.667 5.212,26.667 J1.1@5.207,26.662
V_USB: J2.1 J3.2 Q4.1 Q5.3 | length 26.7
  Top Layer w0.45: Q4.1@7.361,38.595 8.057,38.595 8.321,38.331 8.321,35.521 7.594,34.794 7.594,29.334 8.6,28.327 8.6,25.6 8.374,25.374 Q5.3@7.631,25.374
  Top Layer w0.5: J2.1@4.7,38.602 J2.1@4.703,38.599 7.361,38.599 Q4.1@7.361,38.595
  Top Layer w0.6: J3.2@2.025,44.409 2.118,44.317 3.083,44.317 7.243,40.157 Q4.1@7.243,38.717
WAKE_MT3620: D1.2 J4.10 M1.35 R5.1 R32.2 | length 86.2
  Top Layer w0.45: v1(19.7,28.4) 19.044,27.744 R32.2@19.044,26.418 19.2,26.262 19.438,26.262 23.65,22.05 D1.2@32.1,22.05 ; M1.35@31.184,47 31.242,46.942 31.242,44.858 R5.1@31.3,44.8 ; v1(31.35,43.907) R5.1@31.35,44.8 ; v1(39.61,44.31) 39.616,44.316 39.616,46.103 43.813,50.3 v1(45.575,50.3) ; J4.10@42.714,71.54 42.762,71.492 44.308,71.492 44.825,70.975 44.825,67.675 45.575,66.925 v1(45.575,63)
  Bottom Layer w0.45: v1(19.7,28.4) 20.75,29.45 20.75,40.75 23.907,43.907 v1(31.35,43.907) 38.385,43.907 38.75,44.272 39.572,44.272 v1(39.61,44.31) ; v1(45.575,50.3) v1(45.575,63)
WAKE_STM32: M1.17 R6.2 U2.6 | length 36.6
  Top Layer w0.5: v1(9.935,51.246) 9.963,51.275 9.963,51.963 R6.2@10,52 M1.17@12.984,52 ; v1(11.281,21.057) 11.492,21.057 12.177,20.372 12.177,19.474 U2.6@12.181,19.47
  Bottom Layer w0.45: v1(9.935,51.246) 9.944,51.236 9.944,50.386 10.475,49.856 10.475,21.863 v1(11.281,21.057)
pads on no net: J1. J2.2 J2.3 J2.4 J4.1 J4.8 J5.1 J6.1 J6.6 J6.7 J6.8 J6.9 J10.6 J10.7 J10.8 M1.9 M1.10 M1.11 M1.13 M1.14 M1.19 M1.21 M1.22 M1.23 M1.24 M1.25 M1.26 M1.27 M1.28 M1.30 M1.31 M1.50 Q4.4 Q4.5 Q5.4 Q5.5 U2.7 U2.10 U2.12 U2.20 U2.22 U2.25 U3.5 U4.5 U5.5

## Polygon pours and split planes (outlines as drawn)
GND on Top Layer "TopGND" (solid, pour order 9): 49.182,0 ccw(c49.182,0.8) 49.982,0.8 49.982,79.2 ccw(c49.182,79.2) 49.182,80 0.782,80 ccw(c0.781,79.2) -0.018,79.2 -0.018,0.8 ccw(c0.781,0.8) 0.782,0
GND on Bottom Layer "BotGND" (solid, remove dead copper, pour order 10): 49.225,0 ccw(c49.225,0.8) 50.025,0.8 50.025,79.2 ccw(c49.225,79.2) 49.225,80 0.825,80 ccw(c0.825,79.2) 0.025,79.2 0.025,0.8 ccw(c0.825,0.8) 0.825,0
GND on Mid-Layer 1 "Inner-GND" (solid, pour order 11): -0.003,0.45 ccw(c0.45,0.45) 0.45,-0.003 0.45,0 49.55,0 49.55,-0.003 ccw(c49.55,0.45) 50.003,0.45 50,0.45 50,79.6 50.003,79.55 ccw(c49.55,79.55) 49.55,80.003 49.547,80 32.9,80 32.95,80.003 ccw(c32.95,79.55) 32.497,79.55 32.497,73.45 32.503,73.45 cw(c32.05,73.45) 32.05,72.997 32.05,73 15.947,73 15.95,72.997 cw(c15.95,73.45) 15.497,73.45 15.503,73.444 15.503,79.55 ccw(c15.05,79.55) 15.05,80.003 0.45,80.003 ccw(c0.45,79.55) -0.003,79.55 0,79.55
3V3_MT3620 on Mid-Layer 2 "3V3_MT3620_L03_P013" (solid, pour order 13): 0,80 0,31.7 50,31.7 50,80
3V3_AON on Mid-Layer 2 "3V3_AON_L03_P012" (solid, pour order 12): 0,0 50,0 50,31.5 0,31.5

## Silkscreen, mask and mechanical layers (free items; w line width, h text height)
Top Overlay:
  circle w0.2: c44.196,0.762 r0.1
  rectangle: 15,40 20.5,43.151
  lines w0.1: 33.169,40.5 33.172,40.497 ; 33.3,23 33.3,23 ; 33.3,23 33.3,23
  lines w0.2: 4.075,51.351 7.375,51.351 ; 4.1,52.6 7.4,52.6 ; 4.3,2.2 7.1,2.2 ; 4.3,3.495 7.118,3.495 ; 4.3,4.8 7.1,4.8 ; 4.671,46 7.4,46 ; 28,27.92 28,29.4 ; 31.2,39.1 31.2,40.4 ; 32.678,33.404 33.278,34.004 ; 32.7,23.6 33.3,23 ; 33.169,40.5 26.8,40.5 26.8,39.1 33.172,39.1 33.172,40.497 ; 33.7,23 34,23 34.3,23.3 34.85,22.75 35.4,23.3 36,22.7 36.3,23 36.6,23 ; 33.7,34 34,34 34.3,34.3 34.9,33.7 35.45,34.25 36,33.7 36.3,34 36.6,34 ; 33.9,30.9 33.9,33.1 ; 34.1,24 34.1,26.5 ; 34.4,43.9 40,43.9 ; 34.4,45.1 40,45.1 ; 36.2,31 36.2,33 ; 36.4,24.1 36.4,26.5 ; 36.978,34.004 37.578,33.404 ; 37,23 37.6,23.6 ; 37.2,30.9 37.8,30.3 ; 40.953,29.347 40.002,30.298 ; 37.8,30.3 40.002,30.3 ; 37.8,30.3 37.8,30.3 ; 40.002,30.298 40.002,30.3 ; 40.002,30.298 40.002,30.3 ; 4,50.2 7.4,50.2 7.4,53.8 4,53.8 4,50.2 ; 4.2,0.8 7.2,0.8 7.2,6.1 4.2,6.1 4.2,0.8 ; 4.571,44.8 7.44,44.8 7.44,47.3 4.571,47.3 4.571,44.8 ; 31,24 40.2,24 40.2,26.6 31,26.6 31,24 ; 31.3,30.9 39.3,30.9 39.3,33.1 31.3,33.1 31.3,30.9 ; 34.3,42.6 40.1,42.6 40.1,46.3 34.3,46.3 34.3,42.6
  text "MT3620 - LEDs" at 3.6,78.514 h1.25
  text "MT3620 - A" at 1.5,68.814 h1.25
  text "MT3620 -" at 38.883,66.2 h1.52 r90
  text "RECOVERY" at 40.483,65.5 h1.52 r90
  text "MT3620 - SPARE" at 0.626,57.483 h1.3
  text "GND" at 4.8,52.911 h1
  text "MT3620 -" at 39.083,52.9 h1.52 r90
  text "GPIO 9" at 4.318,51.699 h0.9
  text "GPIO41" at 4.267,50.454 h0.9
  text "SERVICE, DEBUG" at 40.807,49.6 h1.52 r90
  text "GND" at 4.9,46.312 h1.1
  text "EXT_PMU_EN" at 34.792,45.339 h0.8
  text "5V" at 5.359,45.072 h1.1
  text "PSU_EN" at 35.239,44.145 h0.85
  text "Pull Up" at 35.434,42.85 h0.9
  text "P-MT3620EXMSTLP-2-0" at 8.039,42.413 h2
  text "USB Power Only" at 3.3,41.844 h1.3
  text "PMU_EN" at 27.127,39.522 h1
  text "PD" at 31.7,39.5 h1
  text "MT3620 - SWD" at 41.483,36 h1.52 r90
  text "3V3" at 34.244,31.6 h1
  text "Sense" at 36.562,31.603 h1
  text "3V3 / RTC" at 31.734,31.3 h1
  text "+" at 5.243,27.393 h1.2
  text "Sense" at 31.271,25 h1
  text "3V3" at 34.544,25 h1
  text "3V3 / MT3620" at 36.714,24.6 h1
  text "-" at 5.352,24.369 h1.2
  text "STM32 -  / LEDs" at 23.086,18.5 h1.25
  text "MT3620 - RESET" at 31,18.114 h1.25
  text "STM32 -" at 0.6,14.714 h1.3
  text "SPARE" at 4.3,13.814 h1.3
  text "STM32 - SWD" at 41.483,10.4 h1.52 r90
  text "STM32 - A" at 10.16,8.396 h1.25
  text "STM32 - B" at 24.13,8.396 h1.25
  text "STM32 - RESET" at 36.068,8.142 h1.25
  text "GND" at 4.547,5.067 h1.1
  text "GND" at 46.786,4.8 h1.25 r90
  text "PA7" at 4.75,3.759 h1.1
  text "PB0" at 4.801,2.527 h1.1
  text "PB1" at 4.8,1.1 h1.3
  text "D" at 49.1,0.7 h0.4
Bottom Overlay:
  region: 10,60 35,60 35,46 10,46
Mechanical 1:
  lines w0.2: 0,0 50,0 50,80 0,80 0,0
  text ".Pcb_File_Name_No_Path" at 0,-2.5 h1.52
Mechanical 11:
  lines w1.2: 32.484,73 32.484,73.337 32.494,73.362 32.497,73.45 32.497,79.55 32.497,79.64 32.566,79.806 32.694,79.934 32.86,80.003 32.95,80.003 32.9,80 49.55,80.003 49.64,80.003 49.806,79.934 49.934,79.806 50.003,79.64 50.003,79.55 50,79.6 50.003,0.45 50.003,0.36 49.934,0.194 49.806,0.066 49.64,-0.003 49.55,0 0.45,-0.003 0.36,-0.003 0.194,0.066 0.066,0.194 -0.003,0.36 0,0.45 -0.003,79.55 -0.003,79.64 0.066,79.806 0.194,79.934 0.36,80.003 0.45,80 15.097,80 15.05,80.003 15.14,80.003 15.306,79.934 15.434,79.806 15.484,79.685 15.484,73 15.962,73 32.05,72.997 32.078,73 32.484,73 ; 32.484,73 32.484,73